# Altium PCB IGresupply.PcbDoc
Units mm, origin at the board's own origin, x right, y up, seen from the top; angles counter-clockwise.
Board outline 120.25 x 120.25 mm, 2 copper layers (Top Layer, Bottom Layer); 151 components, 101 nets, 570 pads, 87 vias.
Unrouted connection lines stored in the file: 13.
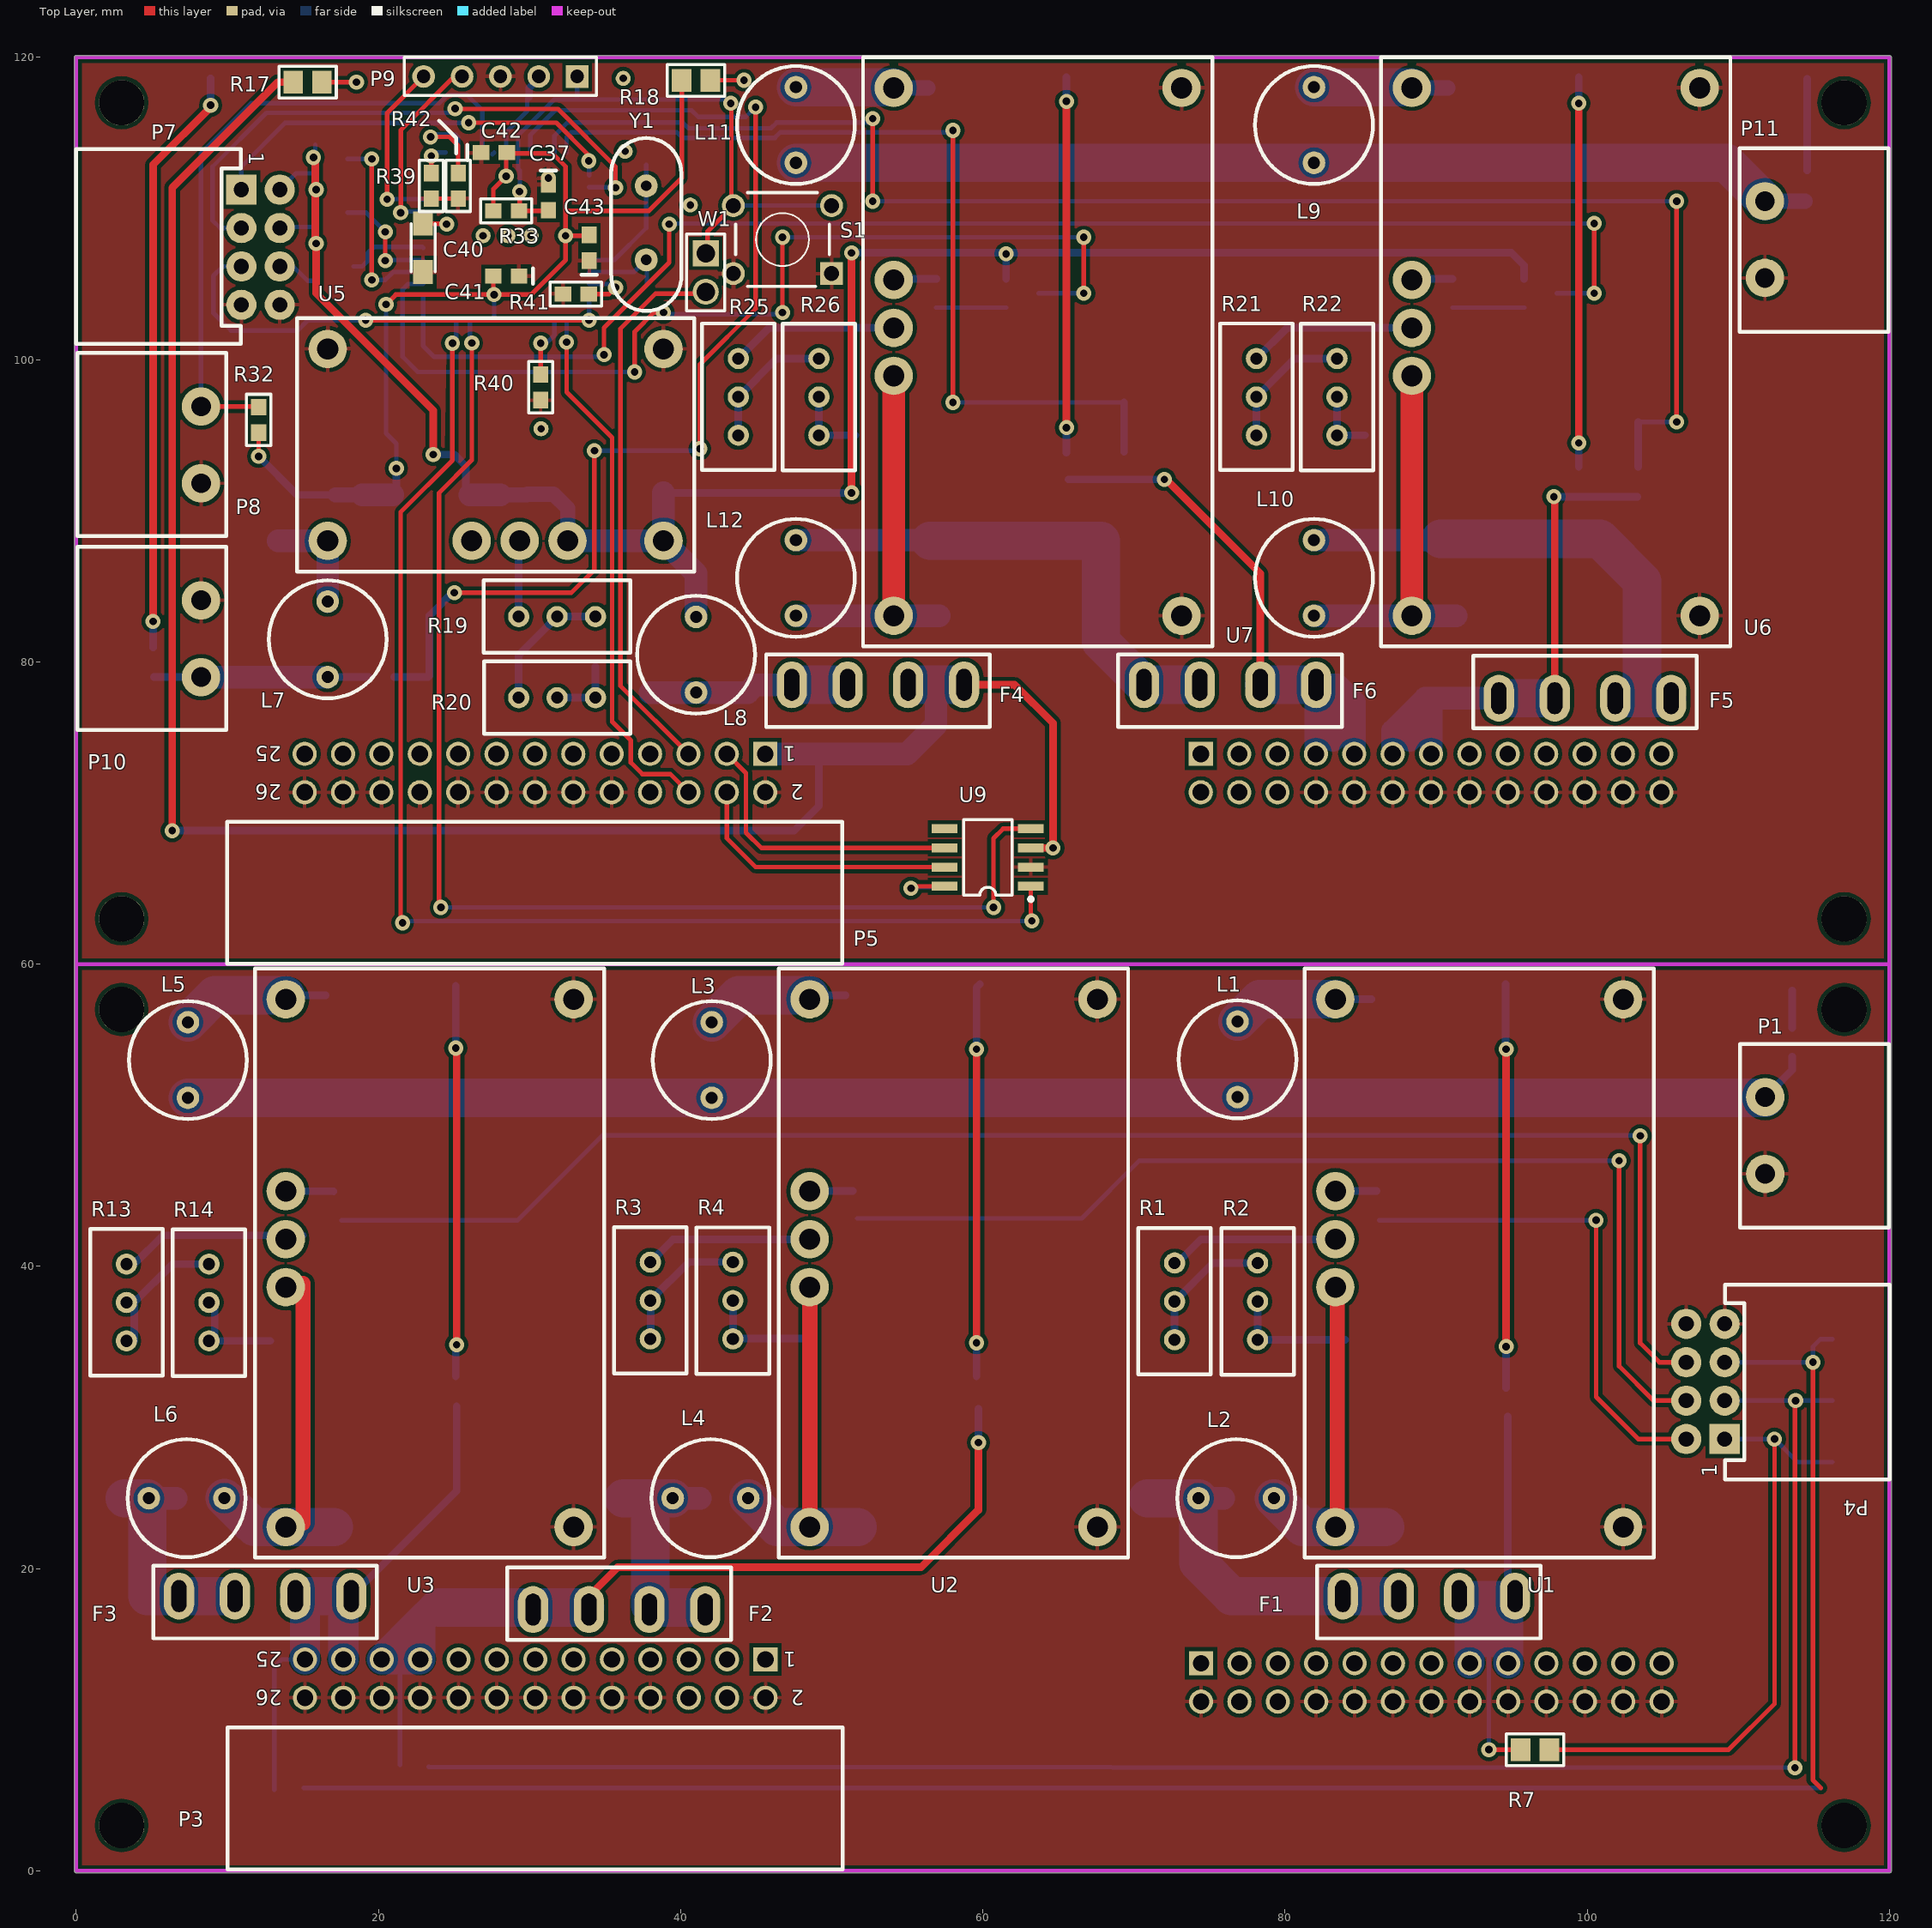
[diagram p0: Top Layer view]
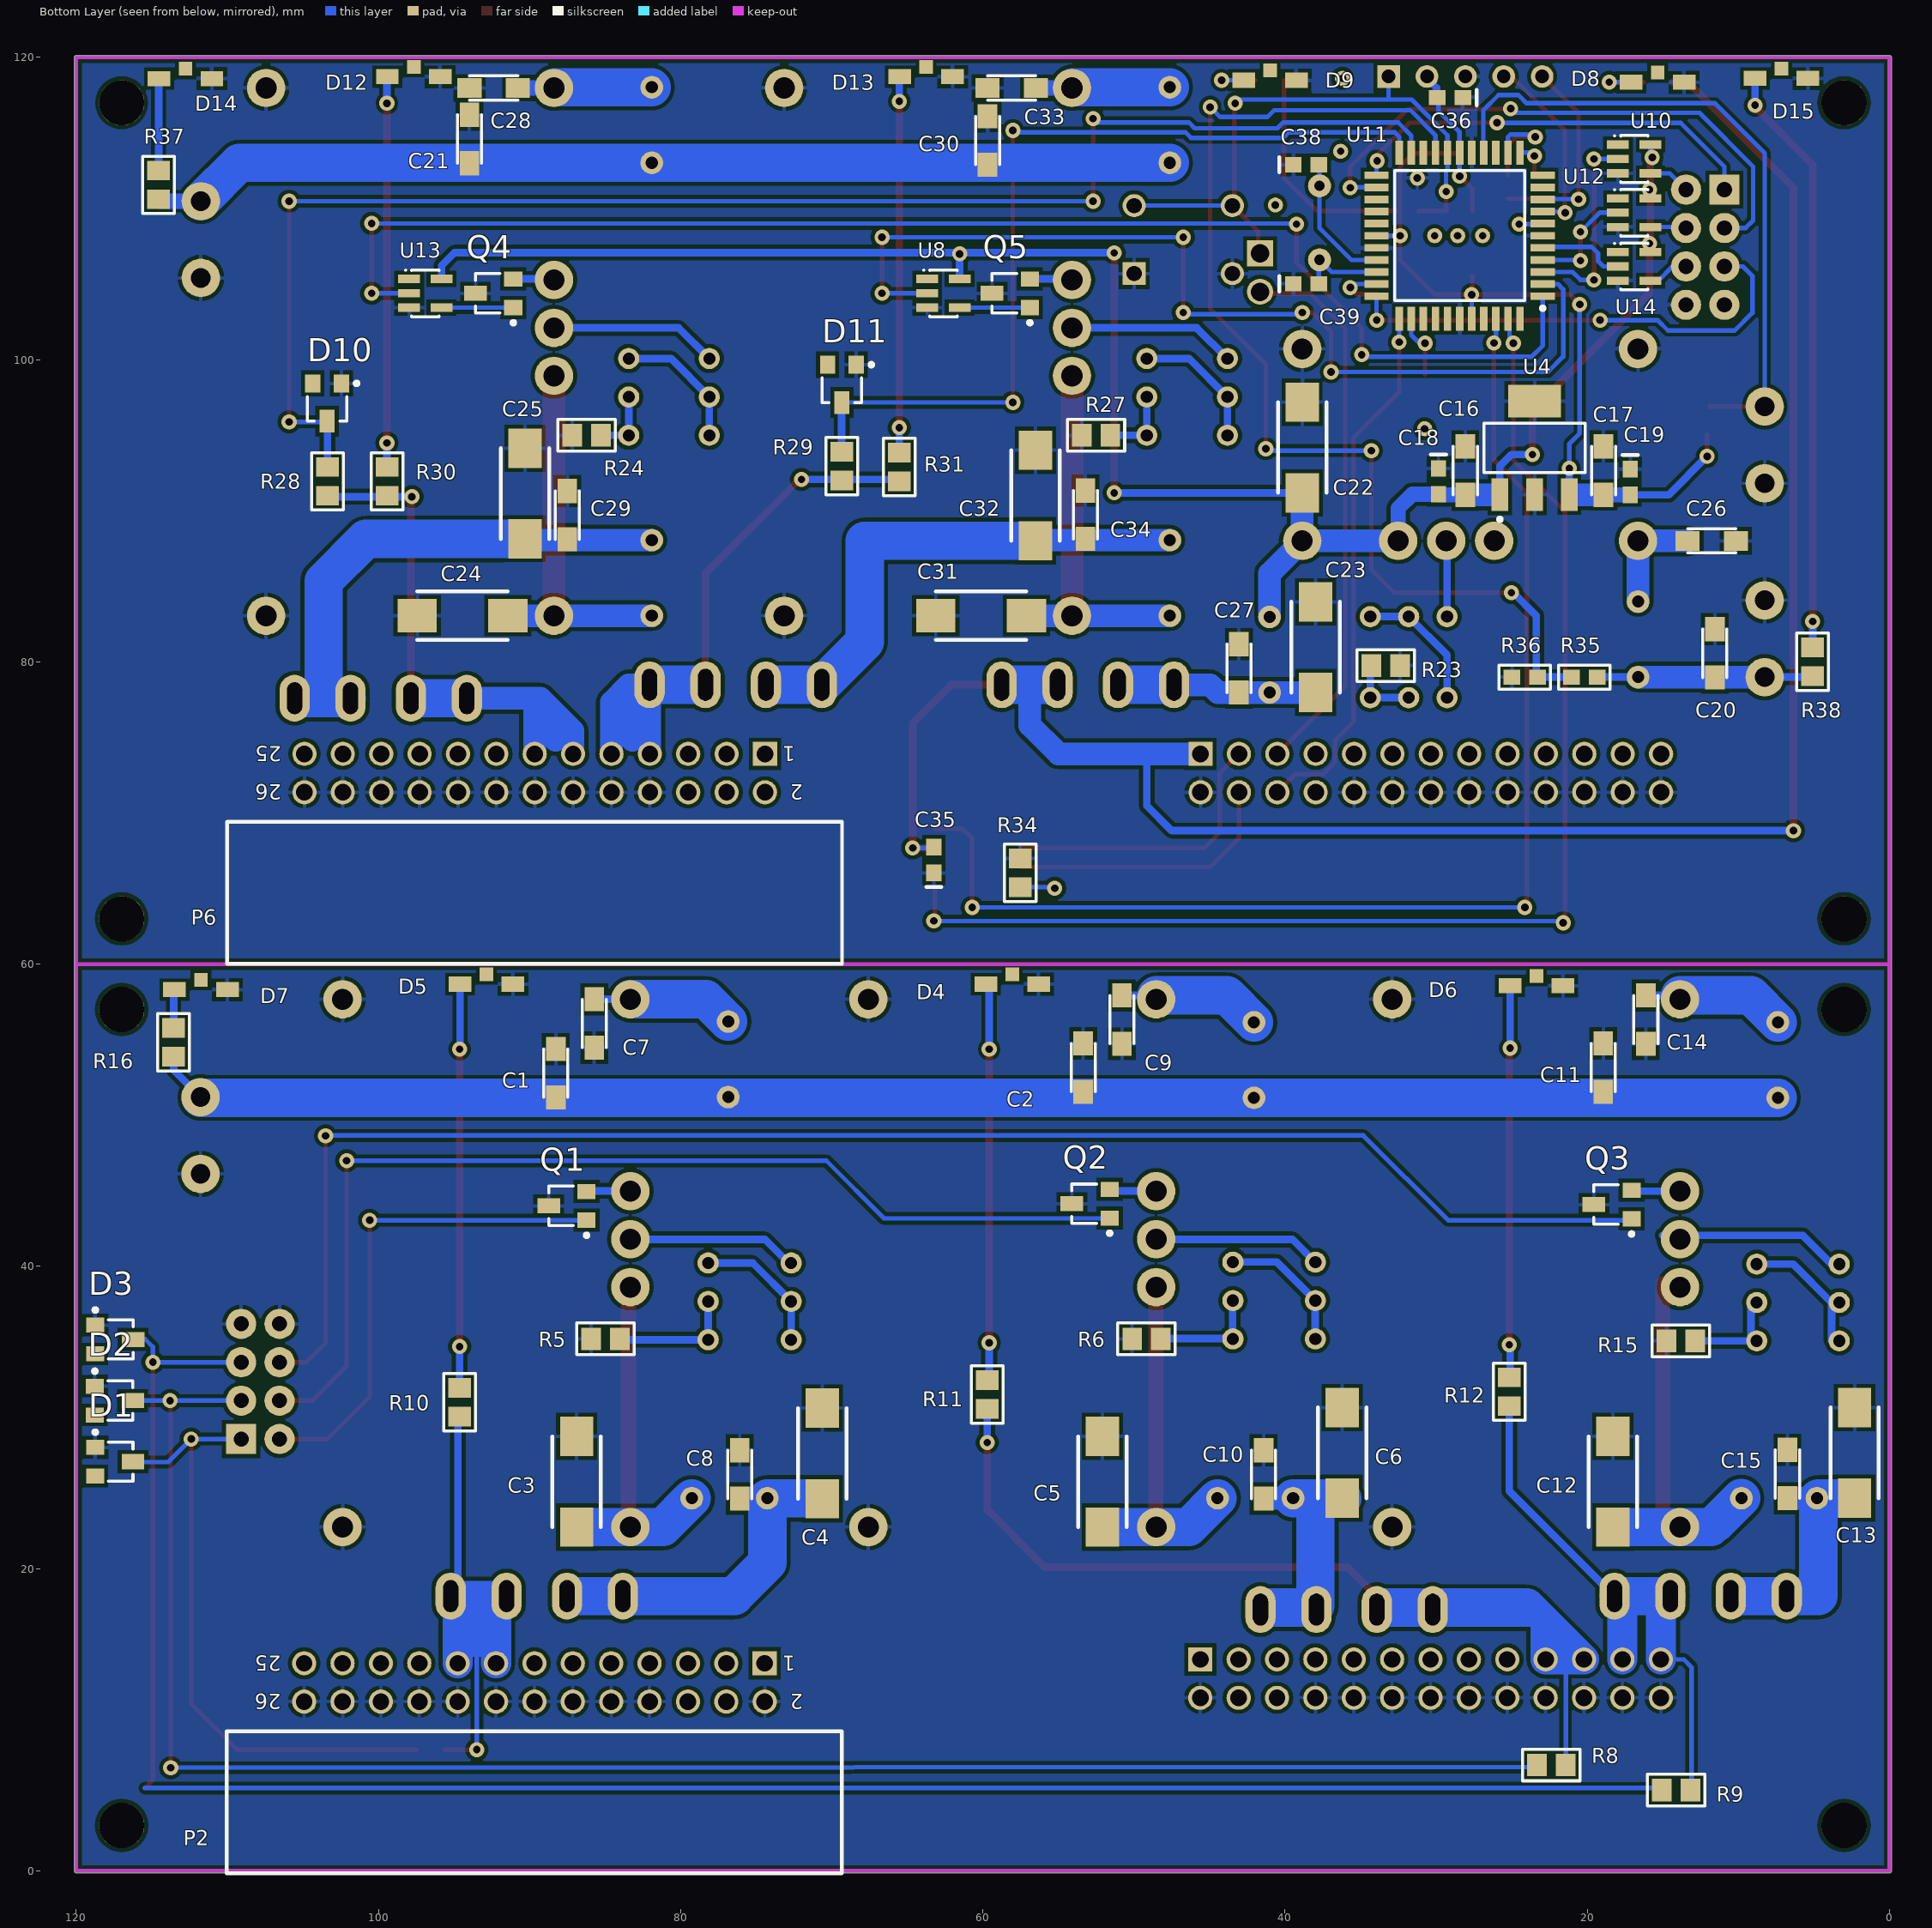
[diagram p1: Bottom Layer view, seen from below]

## Layer stack, top to bottom
Top Layer: signal copper 0.0356
Dielectric: dielectric 0.32, FR-4, Dk 4.8
Bottom Layer: signal copper 0.0356

## Board outline
0,-0.127 cw(c0,0) -0.127,0 -0.127,120 cw(c0,120) 0,120.127 120,120.127 cw(c120,120) 120.127,120 120.127,0 cw(c120,0) 120,-0.127

## Design rules (kind name [scope] priority, off if disabled: settings)
Clearance [All] p1: gap=0.254
PolygonConnect [All] p1: connectstyle=Relief reliefconductorwidth=0.254 reliefentries=4 polygonreliefangle="90 Angle"
RoutingVias [All] p1: holewidth=0.5 width=1 viastyle="Through Hole" minholewidth=0.5 minwidth=1 maxholewidth=0.711 maxwidth=1.27
SilkscreenOverComponentPads [All] p1: minsilkscreentomaskgap=0.254
SolderMaskExpansion [All] p1: expansion=0.102
Width [All] p1: maxlimit=2.54 minlimit=0.1 preferedwidth=0.3 minimp=50.000000 maximp=50.000000 favimp=50.000000
27 further rules are at their usual default settings.

## Classes and differential pairs
component class IGresupply2-2: C1 C2 C3 C4 C5 C6 C7 C8 C9 C10 C11 C12 C13 C14 C15 D1 D2 D3 D4 D5 D6 D7 F1 F2 F3 L1 L2 L3 L4 L5 L6 P1 P2 P3 P4 Q1 Q2 Q3 R1 R2 R3 R4 R5 R6 R7 R8 R9 R10 R11 R12 R13 R14 R15 R16 U1 U2 U3
component class IGresupply1-2: C16 C17 C18 C19 C20 C21 C22 C23 C24 C25 C26 C27 C28 C29 C30 C31 C32 C33 C34 C35 C36 C37 C38 C39 C40 C41 C42 C43 D8 D9 D10 D11 D12 D13 D14 D15 F4 F5 F6 L7 L8 L9 L10 L11 L12 P5 P6 P7 P8 P9 P10 P11 Q4 Q5 R17 R18 R19 R20 R21 R22 R23 R24 R25 R26 R27 R28 R29 R30 R31 R32 R33 R34 R35 R36 R37 R38 R39 R40 R41 R42 S1 S2 U4 U5 U6 U7 U8 U9 U10 U11 U12 U13 U14 W1 Y1

## Components (designator, comment, footprint, x,y, rotation, side; value= is the part's Value field where it differs from the comment)
C1 "Cap" "Boitier tantale A" 88.265,54.381 r270 bottom
C2 "Cap" "Boitier tantale A" 53.359,54.756 r270 bottom
C3 "Cap Pol" "Boitier tantale C" 86.887,22.752 r90 bottom
C4 "Cap Pol" "Boitier tantale C" 70.631,24.626 r90 bottom
C5 "Cap Pol" "Boitier tantale C" 52.089,22.752 r90 bottom
C6 "Cap Pol" "Boitier tantale C" 36.214,24.657 r90 bottom
C7 "Cap" "Boitier tantale A" 85.719,54.477 r90 bottom
C8 "Cap" "Boitier tantale A" 76.092,27.832 r270 bottom
C9 "Cap" "Boitier tantale A" 50.794,54.731 r90 bottom
C10 "Cap" "Boitier tantale A" 41.421,27.832 r270 bottom
C11 "Cap" "Boitier tantale A" 18.942,54.756 r270 bottom
C12 "Cap Pol" "Boitier tantale C" 18.307,22.752 r90 bottom
C13 "Cap Pol" "Boitier tantale C" 2.305,24.657 r90 bottom
C14 "Cap" "Boitier tantale A" 16.123,54.731 r90 bottom
C15 "Cap" "Boitier tantale A" 6.75,27.857 r270 bottom
C16 "Cap Pol" "Boitier tantale A" 28.067,91.059 r90 bottom
C17 "Cap Pol" "Boitier tantale A" 18.923,91.059 r90 bottom
C18 "Cap" C0603 29.845,91.948 r270 bottom
C19 "Cap" C0603 17.145,91.909 r270 bottom
C20 "Cap" "Boitier tantale A" 11.557,82.169 r270 bottom
C21 "Cap" "Boitier tantale A" 93.98,116.205 r270 bottom
C22 "Cap Pol" "Boitier tantale C" 38.862,91.186 r90 bottom
C23 "Cap Pol" "Boitier tantale C" 37.973,77.978 r90 bottom
C24 "Cap Pol" "Boitier tantale C" 91.44,83.058 r0 bottom
C25 "Cap Pol" "Boitier tantale C" 90.297,88.138 r90 bottom
C26 "Cap" "Boitier tantale A" 10.16,88.011 r0 bottom
C27 "Cap" "Boitier tantale A" 43.053,81.178 r270 bottom
C28 "Cap" "Boitier tantale A" 93.98,117.983 r180 bottom
C29 "Cap" "Boitier tantale A" 87.503,91.313 r270 bottom
C30 "Cap" "Boitier tantale A" 59.69,116.103 r270 bottom
C31 "Cap Pol" "Boitier tantale C" 57.119,83.058 r0 bottom
C32 "Cap Pol" "Boitier tantale C" 56.515,88.011 r90 bottom
C33 "Cap" "Boitier tantale A" 59.69,117.983 r180 bottom
C34 "Cap" "Boitier tantale A" 53.213,91.338 r270 bottom
C35 "Cap" C0603 63.246,66.89 r90 bottom
C36 "Cap" C0603 29.083,117.348 r0 bottom
C37 "Cap" C0603 31.242,110.744 r270 top
C38 "Cap" C0603 38.608,112.903 r180 bottom
C39 "Cap" C0603 38.608,105.029 r180 bottom
C40 "Cap Pol" "Boitier tantale A" 22.948,109.004 r270 top
C41 "Cap" C0603 28.448,105.537 r180 top
C42 "Cap" C0603 27.648,113.704 r0 top
C43 "Cap" C0603 33.948,107.404 r90 top
D1 "BZX84C3V3" SOT-23 117.5,27.076 r270 bottom
D2 "BZX84C3V3" SOT-23 117.526,31.115 r270 bottom
D3 "BZX84C3V3" SOT-23 117.495,35.164 r270 bottom
D4 "LED1" HSMS-C110 59.808,58.678 r180 bottom
D5 "LED1" HSMS-C110 94.606,58.678 r180 bottom
D6 "LED1" HSMS-C110 25.109,58.566 r180 bottom
D7 "LED1" HSMS-C110 113.501,58.312 r180 bottom
D8 "LED1" HSMS-C110 17.089,118.364 r180 bottom
D9 "LED1" HSMS-C110 42.743,118.491 r180 bottom
D10 "BZX84C3V3" SOT-23 103.403,97.18 r0 bottom
D11 "BZX84C3V3" SOT-23 69.332,98.42 r0 bottom
D12 "LED1" HSMS-C110 99.413,118.73 r180 bottom
D13 "LED1" HSMS-C110 65.504,118.73 r180 bottom
D14 "LED1" HSMS-C110 114.526,118.603 r180 bottom
D15 "LED1" HSMS-C110 8.89,118.618 r180 bottom
F1 "Fuse 1" MCCQ-122 83.822,18.18 r0 top
F2 "Fuse 1" MCCQ-122 41.628,17.291 r180 top
F3 "Fuse 1" MCCQ-122 6.797,18.18 r0 top
F4 "Fuse 1" MCCQ-122 47.354,78.486 r0 top
F5 "Fuse 1" MCCQ-122 105.554,77.597 r180 top
F6 "Fuse 1" MCCQ-122 70.659,78.486 r0 top
L1 "Inductor" 744772010 76.854,51.2 r90 top
L2 "Inductor" 744772010 79.267,24.657 r180 top
L3 "Inductor" 744772010 42.056,51.153 r90 top
L4 "Inductor" 744772010 44.469,24.657 r180 top
L5 "Inductor" 744772010 7.385,51.153 r90 top
L6 "Inductor" 744772010 9.798,24.657 r180 top
L7 "Inductor" 744772010 16.637,78.994 r90 top
L8 "Inductor" 744772010 41.021,82.978 r270 top
L9 "Inductor" 744772010 81.915,113.03 r90 top
L10 "Inductor" 744772010 81.915,83.058 r90 top
L11 "Inductor" 744772010 47.625,113.03 r90 top
L12 "Inductor" 744772010 47.625,83.058 r90 top
P1 "BAT2" "SL 5.08/90"#1 111.779,46.12 r90 top
P2 "Plane bus" HDR2X13H 74.441,13.735 r0 bottom
P3 "Plane bus 2" HDR2X13H 45.612,13.989 r180 top
P4 "Header 4X2H" HDR2X4H 109.093,28.575 r90 top
P5 "Plane bus" HDR2X13H 45.593,73.914 r180 top
P6 "Plane bus 2" HDR2X13H 74.422,73.914 r0 bottom
P7 "Header 4X2H" HDR2X4H 10.922,111.252 r270 top
P8 "AU" "SL 5.08/90"#2 8.255,96.901 r270 top
P9 "ICSP" HDR1X5 33.147,118.745 r180 top
P10 "BAT" "SL 5.08/90"#2 8.255,84.074 r270 top
P11 "BAT2" "SL 5.08/90"#2 111.76,105.41 r90 top
Q1 "SSM3K15FS" SOT-23 87.483,44.008 r90 bottom
Q2 "SSM3K15FS" SOT-23 52.857,44.145 r90 bottom
Q3 "SSM3K15FS" SOT-23 18.313,44.094 r90 bottom
Q4 "SSM3K15FS" SOT-23 92.329,104.394 r90 bottom
Q5 "SSM3K15FS" SOT-23 58.141,104.394 r90 bottom
R1 "RPot SM" 3296X 72.689,35.143 r90 top
R2 "RPot SM" 3296X 78.181,40.223 r270 top
R3 "RPot SM" 3296X 37.992,35.198 r90 top
R4 "RPot SM" 3296X 43.453,40.278 r270 top
R5 "Res2" 0805 84.982,35.198 r180 bottom
R6 "Res2" 0805 49.168,35.198 r180 bottom
R7 "Res2" 0805 96.539,8.02 r180 top
R8 "Res2" 0805 22.371,7.004 r180 bottom
R9 "Res2" 0805 14.116,5.353 r180 bottom
R10 "Res2" 0805 94.634,31.007 r270 bottom
R11 "Res2" 0805 59.709,31.515 r270 bottom
R12 "Res2" 0805 25.165,31.703 r270 bottom
R13 "RPot SM" 3296X 3.321,35.071 r90 top
R14 "RPot SM" 3296X 8.782,40.151 r270 top
R15 "Res2" 0805 13.801,35.071 r180 bottom
R16 "Res2" 0805 113.557,54.822 r270 bottom
R17 "Res2" 0805 15.306,118.364 r180 top
R18 "Res2" 0805 41.021,118.491 r180 top
R19 "RPot SM" 3296X 34.359,83 r180 top
R20 "RPot SM" 3296X 29.279,77.635 r0 top
R21 "RPot SM" 3296X 78.105,94.996 r90 top
R22 "RPot SM" 3296X 83.439,100.076 r270 top
R23 "Res2" 0805 33.34,79.756 r0 bottom
R24 "Res2" 0805 86.233,94.996 r180 bottom
R25 "RPot SM" 3296X 43.815,94.996 r90 top
R26 "RPot SM" 3296X 49.149,100.076 r270 top
R27 "Res2" 0805 52.512,94.996 r180 bottom
R28 "Res2" 0805 103.378,91.948 r270 bottom
R29 "Res2" 0805 69.342,92.964 r270 bottom
R30 "Res2" 0805 99.441,91.948 r270 bottom
R31 "Res2" 0805 65.532,92.903 r270 bottom
R32 "Res2" 0603 12.065,96.012 r270 top
R33 "Res2" 0603 28.448,109.855 r180 top
R34 "Res2" 0805 57.531,66.04 r270 bottom
R35 "Res2" 0603 20.193,78.994 r180 bottom
R36 "Res2" 0603 24.13,78.994 r180 bottom
R37 "Res2" 0805 114.554,111.567 r270 bottom
R38 "Res2" 0805 5.08,80.01 r270 bottom
R39 "Res2" 0603 23.495,111.506 r90 top
R40 "Res2" 0603 30.734,98.171 r90 top
R41 "Res2" 0603 33.071,104.343 r0 top
R42 "Res2" 0603 25.273,111.506 r90 top
S1 "rst" "Bouton poussoir" 46.736,107.95 r180 top
U1 "PTN78020W" EUK 83.331,57.677 r270 top
U2 "PTN78020W" EUK 48.533,57.677 r270 top
U3 "PTN78020W" EUK 13.862,57.677 r270 top
U4 "LM3940IS-3.3" SOT223 23.481,94.159 r180 bottom
U5 "PTN78060W" EUW 16.637,88.011 r0 top
U6 "PTN78020W" EUK 88.392,117.983 r270 top
U7 "PTN78020W" EUK 54.102,117.983 r270 top
U8 "74LVC1G17SE-7" DBV 62.611,104.394 r270 bottom
U9 "MCP2551" SOIC150-8 60.325,67.056 r90 top
U10 "74LVC1G17SE-7" DBV 16.891,113.284 r270 bottom
U11 "dsPIC33FJ128MC804_44pins" TQFP-44 28.448,108.204 r0 bottom
U12 "74LVC1G17SE-7" DBV 16.891,109.728 r270 bottom
U13 "74LVC1G17SE-7" DBV 96.901,104.394 r270 bottom
U14 "74LVC1G17SE-7" DBV 16.891,106.172 r270 bottom
W1 "Jumper" HDR1X2 41.656,107.036 r270 top
Y1 "XTAL" HC49US 37.719,108.966 r270 top

## Footprints (in the part's own frame and the unit in brackets; to place one, negate y for a bottom-side part, rotate by r counter-clockwise, add the part's x,y. Pads: shape width x height; smd on the part's side, far side on the other; paste and mask are expansions set on the pad)
0603 [mm]
  rect 1.1x1 smd: 1(-0.85,0) 2(0.85,0)
  silkscreen extent -1.7,-0.8 1.7,0.8
0805 [mm] "Chip Capacitor; Body 2.0 x 1.2 mm (LxW typ)"
  rect 1.3x1.5 smd: 1(-0.95,0) 2(0.95,0)
  silkscreen extent -1.9,-1.05 1.9,1.05
3296X [mm]
  round 1.4 hole 0.8: 1(0,0) 2(2.54,0) 3(5.08,0)
  silkscreen extent -2.3,-2.4 7.4,2.4
744772010 [mm]
  round 1.5 hole 0.8: 1(0,0) 2(5,0)
  silkscreen extent -1.4,-3.9 6.4,3.9
"Boitier tantale A" [mm]
  rect 1.6x1.3 smd: 1(0,0) 2(3.2,0)
  silkscreen extent 0,-0.8 3.2,0.8, body extent 0,-0.8 3.2,0.8, height 1.9
"Boitier tantale C" [mm]
  rect 2.6x2.2 smd: 1(0,0) 2(6,0)
  silkscreen extent 0,-1.6 6,1.6, body extent -0.13,-1.73 6.13,1.73, height 2.5
"Bouton poussoir" [mm]
  rect 1.524x1.524 hole 1: 1(-3.25,2.25)
  round 1.524 hole 1: 2(-3.25,-2.25) 3(3.25,2.25) 4(3.25,-2.25)
  silkscreen extent -3.1,-3.1 3.1,3.1, body extent -3.2,-3.2 3.2,3.2, height 4
C0603 [mm] "Chip Capacitor; Body 1.6 x 0.8 mm (LxW typ)"
  rect 1.1x1 smd: 1(-0.85,0) 2(0.85,0)
  silkscreen extent -1.78,-0.51 -1.78,0.51
DBV [mm]
  rect 0.55x1.45 smd: 1(-0.95,-1.075) 2(0,-1.075) 3(0.95,-1.075) 4(0.95,1.075) 5(-0.95,1.075)
  silkscreen extent -1.57,-1.35 1.55,0.9
EUK [mil]
  round 100 hole 55: 1(0,750) 2(0,0) 3(500,0) 4(625,0) 5(750,0) 6(1375,0) 7(1375,750)
  silkscreen extent -80,-80 1455,830
EUW [mil]
  round 100 hole 55: 1(0,500) 2(0,0) 3(375,0) 4(500,0) 5(625,0) 6(875,0) 7(875,500)
  silkscreen extent -80,-80 955,580
HC49US [mil]
  round 60 hole 27.56: 1(-100,0) 2(92.91,0)
  silkscreen extent -224,-92 226,92, body extent -224,-91 225,91, height 118
HDR1X2 [mil]
  rect 68x68 hole 48: 1(0,0)
  round 68 hole 48: 2(100,0)
  silkscreen extent -50,-50 150,50
HDR1X5 [mm] "Connector; Header; 5 Position"
  rect 1.5x1.5 hole 0.9: 1(0,0)
  round 1.5 hole 0.9: 2(2.54,0) 3(5.08,0) 4(7.62,0) 5(10.16,0)
  silkscreen extent -1.27,-1.27 11.43,1.27
HDR2X4H [mm] "Connector; Header; 4x2 Position; Right Angle"
  rect 2x2 hole 1: 1(0,0)
  round 2 hole 1: 2(0,2.54) 3(2.54,0) 4(2.54,2.54) 5(5.08,0) 6(5.08,2.54) 7(7.62,0) 8(7.62,2.54)
  silkscreen extent -2.68,-10.94 10.2,-0.04
HDR2X13H [mm] "Connector; Header; 13x2 Position; Right Angle"
  rect 1.6x1.6 hole 1.1: 1(0,0)
  round 1.6 hole 1.1: 2(0,2.54) 3(2.54,0) 4(2.54,2.54) 5(5.08,0) 6(5.08,2.54) 7(7.62,0) 8(7.62,2.54) 9(10.16,0) 10(10.16,2.54) 11(12.7,0) 12(12.7,2.54) 13(15.24,0) 14(15.24,2.54) 15(17.78,0) 16(17.78,2.54) 17(20.32,0) 18(20.32,2.54) 19(22.86,0) 20(22.86,2.54) 21(25.4,0) 22(25.4,2.54) 23(27.94,0) 24(27.94,2.54) 25(30.48,0) 26(30.48,2.54)
  silkscreen extent -5.1,4.5 35.6,13.9
HSMS-C110 [mm]
  rect 0.9x0.9 smd: 0(1.75,0.65)
  rect 1.5x1 smd: 1(0,0) 2(3.5,0)
MCCQ-122 [mm]
  oval 2x3.1 hole 1 slot 2.1 at 90 deg: 1(0,0) 1(3.7,0) 2(7.7,0) 2(11.4,0)
  silkscreen extent -1.7,-2.8 13.1,2
"SL 5.08/90"#1 [mm]
  round 2.54 hole 1.295: 1(0,0) 2(5.08,0)
  silkscreen extent -3.56,-8.18 8.58,1.68
"SL 5.08/90"#2 [mm]
  round 2.54 hole 1.3: 1(0,0) 2(5.08,0)
  silkscreen extent -3.56,-8.18 8.58,1.68
SOIC150-8 [mm] "Small Outline, Plastic, Narrow; 8 Leads; Body Width 3.8 mm; Pitch 1.27 mm"
  rect 0.6x1.7 smd: 1(-1.905,-2.85) 2(-0.635,-2.85) 3(0.635,-2.85) 4(1.905,-2.85) 5(1.905,2.85) 6(0.635,2.85) 7(-0.635,2.85) 8(-1.905,2.85)
  silkscreen extent -2.88,-2.97 2.5,1.6
SOT223 [mm] "SOT-223/SC-73; 4 Leads; Body 6.7 x 7.3 mm, inc. leads (LxW max)"
  rect 1.1x2.15 smd: 1(-2.3,-3.1) 2(0,-3.1) 3(2.3,-3.1)
  rect 3.5x2.15 smd: 4(0,3.1)
  silkscreen extent -3.35,-4.85 3.35,1.63
SOT-23 [mm] "SOT-23; 3 Leads; Body 3.0 x 2.6 mm, inc. leads (LxW max)"
  rect 1x1.2 smd: 1(-0.95,-1.25) 2(0.95,-1.25)
  rect 1x1.5 smd: 3(0,1.25)
  silkscreen extent -2.07,-1.38 1.3,1.25
TQFP-44 [mm] "QFP, Thin; 44 Leads; Body 10 x 10 mm; Pitch 0.8 mm; Lead Form 1.0/0.1 mm"
  rect 1.6x0.5 smd: 1(-5.5,4) 2(-5.5,3.2) 3(-5.5,2.4) 4(-5.5,1.6) 5(-5.5,0.8) 6(-5.5,0) 7(-5.5,-0.8) 8(-5.5,-1.6) 9(-5.5,-2.4) 10(-5.5,-3.2) 11(-5.5,-4) 23(5.5,-4) 24(5.5,-3.2) 25(5.5,-2.4) 26(5.5,-1.6) 27(5.5,-0.8) 28(5.5,0) 29(5.5,0.8) 30(5.5,1.6) 31(5.5,2.4) 32(5.5,3.2) 33(5.5,4)
  rect 0.5x1.6 smd: 12(-4,-5.5) 13(-3.2,-5.5) 14(-2.4,-5.5) 15(-1.6,-5.5) 16(-0.8,-5.5) 17(0,-5.5) 18(0.8,-5.5) 19(1.6,-5.5) 20(2.4,-5.5) 21(3.2,-5.5) 22(4,-5.5) 34(4,5.5) 35(3.2,5.5) 36(2.4,5.5) 37(1.6,5.5) 38(0.8,5.5) 39(0,5.5) 40(-0.8,5.5) 41(-1.6,5.5) 42(-2.4,5.5) 43(-3.2,5.5) 44(-4,5.5)
  silkscreen extent -5.62,-4.3 4.3,4.92

## Part data
C1 C2 C7 C8 C9 C10 C11 C14 C15 C18 C19 C20 C21 C26 C27 C28 C29 C30 C33 C34 C35 C36 C37 C38 C39 C41 C42 C43: "Capacitor"
C3 C4 C5 C6 C12 C13 C16 C17 C22 C23 C24 C25 C31 C32 C40: "Polarized Capacitor"
D1 D2 D3 D10 D11: library part "D Zener", "Zener Diode"
D4 D5 D6 D7 D8 D9 D12 D13 D14 D15: "Typical RED GaAs LED"
F1 F2 F3 F4 F5 F6: "Fuse"
P1 P8 P10 P11: library part 0436500203, "Micro-Fit, 3.0"
P2 P3 P5 P6: library part "Header 13X2H", "Header, 13-Pin, Dual row, Right Angle"
P4 P7: "Header, 4-Pin, Dual row, Right Angle"
P9: library part "Header 5", "Header, 5-Pin"
Q1 Q2 Q3 Q4 Q5: library part NMOS-2, "N-Channel Power MOSFET"
R1 R2 R3 R4 R13 R14 R19 R20 R21 R22 R25 R26: "Square Trimming Potentiometer"
R5 R6 R7 R8 R9 R10 R11 R12 R15 R16 R17 R18 R23 R24 R27 R28 R29 R30 R31 R32 R33 R34 R35 R36 R37 R38 R39 R40 R41 R42: "Resistor"
S1: library part SW-DPST, "Double-Pole, Single-Throw Switch"
U4: "1A Low-Dropout Regulator For 5V to 3.3V Conversion"
U8 U10 U12 U13 U14: "SINGLE BUS BUFFER GATE  WITH 3-STATE OUTPUT"
U9: "High Speed Can Transceiver"
W1: "Jumper Wire"
Y1: "Crystal Oscillator"

## Free pads (board coordinates)
  round 3 hole 3: 0(3,3) 0(3,57) 0(3,63) 0(3,117) 0(117,3) 0(117,57) 0(117,63) 0(117,117)
  round 1 hole 0.5: 0(26.924,108.204) 0(30.759,95.428) 1(28.575,108.204) 2(30.099,108.204) 3(31.242,112.014) 4(36.195,118.618) 5(40.64,110.236) 6(36.322,113.792)

## Via types
v1: diameter 1, hole 0.5, Top Layer to Bottom Layer, 87 vias

## Nets (pads, with @x,y where several pads share a name; then routed paths per layer and width w, separated by ;. In a path a pad name is that pad's centre, name@x,y a point inside that pad or via, vN(x,y) a via of type N, cw(c..) or ccw(c..) an arc to the next point about the centre after c; other vN are vias at no path point)
3V3: C17.1 C19.2 C36.2 C41.2 C42.2 C43.2 P9.2 R18.2 R32.2 R33.2 U4.3 U11.17 U11.28 U11.40 | length 80.5
  Top Layer w0.3: v1(12.065,93.599) R32.2@12.065,95.035 ; v1(20.498,103.657) 21.145,104.305 v1(27.648,104.305) 30.086,104.305 32.385,106.604 v1(32.385,108.204) ; v1@27.598,104.355 C41.2 ; R33.2 27.598,111.291 v1(28.448,112.141) 28.448,113.654 31.507,113.654 32.385,112.776 32.385,109.855 ; C43.2 33.898,108.204 v1(32.385,108.204) ; R18.2 40.071,112.028 37.898,109.855 32.385,109.855 ; v1(32.385,108.204) 32.385,109.855
  Bottom Layer w0.3: v1(20.498,103.657) 20.498,95.123 21.181,94.44 v1(21.181,92.809) ; U11.40 v1(27.648,104.305) ; v1(28.448,112.141) U11.17 28.448,115.062 29.845,116.459 29.845,117.26 C36.2 C36.2@29.972,117.387 ; v1(32.385,108.204) U11.28
  Bottom Layer w0.5: v1(12.065,93.599) 14.605,91.059 C19.2 ; U4.3 v1(21.181,92.809) ; C36.2@29.972,117.387 29.972,117.983 30.607,118.618 P9.2
  Bottom Layer w1: C19.2 C17.1
  Bottom Layer w1.5: C17.1 U4.3@20.955,91.059
+5V: C16.1 C18.2 C22.1 L8.1 U4.1 U5.5 U5.6 U8.5 U10.5 U12.5 U13.5 U14.5 | length 128.7
  Top Layer w0.5: v1(15.697,113.386) 15.816,113.267 v1@15.816,107.755 ; v1(15.875,107.696) 15.875,104.394 23.622,96.647 v1(23.622,93.726) ; v1(51.308,91.186) v1(51.308,107.061)
  Bottom Layer w0.3: v1(15.697,113.386) 15.816,113.504 U10.5 ; U12.5 v1@15.816,111.193 ; v1(51.308,107.061) v1@51.412,106.957 ; v1@61.454,106.957 61.536,106.875 v1@61.618,106.957
  Bottom Layer w0.5: v1(23.622,93.726) 25.019,93.726 25.781,92.964 U4.1 ; C22.1 v1@51.054,91.186 ; v1@51.308,107.084 v1@61.454,107.084 ; U8.5 v1@61.536,106.875 ; v1@61.618,107.084 94.973,107.084 95.826,106.231 U13.5
  Bottom Layer w1: C16.1 C18.2@29.806,91.059 ; C18.2 31.584,91.098 32.512,90.17 U5.5
  Bottom Layer w1.5: U4.1@26.035,91.059 C16.1 ; U5.5 U5.6 ; C22.1 U5.6 ; L8.1 41.021,85.852 U5.6
  other v1: 61.536,107.002 15.875,111.252
"ARRêT D'URGENCE": P8.1 R32.1 U11.15 | length 43.9
  Top Layer w0.3: P8.1 R32.1@11.899,96.901
  Bottom Layer w0.3: P8.1 8.255,113.665 11.557,116.967 24.003,116.967 24.551,117.515 25.868,117.515 26.873,116.51 26.873,113.729 U11.15
BOOTSTRAP: P5.6 U11.34 | length 35.8
  Top Layer w0.3: v1(32.448,101.156) 32.448,97.854 35.463,94.839 35.463,76.043 36.703,74.803 36.703,73.34 37.465,72.578 39.309,72.578 P5.6
  Bottom Layer w0.3: v1(32.448,101.156) U11.34
CAN_RX: U9.4 U11.42 | length 83.7
  Top Layer w0.3: v1@24.003,63.754 24.003,91.186 26.175,93.358 v1@26.175,100.851 ; v1(60.706,63.754) 60.706,68.326 61.341,68.961 U9.4
  Bottom Layer w0.3: v1(24.13,63.754) v1(60.706,63.754) ; v1@26.048,100.851 U11.42
  other v1: 26.175,101.105
CAN_TX: U9.1 U11.43 | length 85.5
  Top Layer w0.3: v1@21.463,62.85 21.463,89.916 24.892,93.345 v1@24.892,100.838 ; U9.1 63.175,62.936 v1(63.246,62.865)
  Bottom Layer w0.3: v1(21.59,62.738) 21.702,62.85 63.231,62.85 v1(63.246,62.865) ; v1@24.765,100.838 24.765,101.092 25.144,101.471 25.144,102.6 U11.43
  other v1: 24.892,101.092
CANH: P5.4 U9.7 | length 18.3
  Top Layer w0.3: P5.4 43.053,68.326 44.958,66.421 U9.7
CANL: P5.3 U9.6 | length 19.3
  Top Layer w0.3: P5.3 44.323,72.644 44.323,68.707 45.339,67.691 U9.6
"FUSE 2_PIC": D10.3 R28.1 U11.21 | length 101.5
  Top Layer w0.3: v1(52.705,110.49) v1@52.705,115.824 ; v1(105.918,95.885) v1(105.918,110.49)
  Bottom Layer w0.3: U11.21 31.648,114.833 32.512,115.697 40.132,115.697 40.513,115.316 45.974,115.316 46.355,115.697 v1@52.705,115.697 ; v1(52.705,110.49) v1(105.918,110.49) ; D10.3@103.378,95.885 v1(105.918,95.885)
  Bottom Layer w0.5: R28.1 D10.3@103.378,95.885
  other v1: 52.705,115.951
"FUSE 3_PIC": D11.3 R29.1 U11.22 | length 59.6
  Top Layer w0.3: v1(58.019,97.175) v1(58.019,115.169)
  Bottom Layer w0.3: U11.22 32.448,114.744 32.746,115.042 39.751,115.042 40.112,114.681 46.228,114.681 46.589,115.042 v1@58.019,115.042 ; v1(58.019,97.175) D11.3@69.342,97.175
  Bottom Layer w0.5: R29.1 D11.3@69.342,97.175
"FUSE 4": D1.3 P4.1 R7.1 | length 41.4
  Top Layer w0.3: R7.1 109.366,8.02 112.395,11.049 v1(112.395,28.575)
  Bottom Layer w0.3: P4.1 v1(112.395,28.575) 113.919,27.051 D1.3@116.225,27.051
"FUSE 4_PIC": P7.1 U11.23 | length 28
  Top Layer w0.3: v1(25.969,115.682) 31.765,115.682 33.909,113.538 v1(33.909,113.157)
  Bottom Layer w0.3: P7.1 10.922,112.776 13.807,115.661 25.948,115.661 v1(25.969,115.682) ; v1(33.909,113.157) 33.948,113.118 U11.23
"FUSE 5": D2.3 P4.3 R8.1 | length 121.8
  Top Layer w0.3: v1(113.75,6.816) v1@113.75,31.073
  Bottom Layer w0.3: R8.1@23.321,6.877 v1(113.75,6.816) ; P4.3 v1(113.792,31.115) D2.3@116.225,31.115
"FUSE 5_PIC": P7.3 U11.24 | length 38.7
  Top Layer w0.3: v1(25.07,116.611) 25.095,116.586 31.877,116.586 35.687,112.776 v1(35.687,111.379)
  Bottom Layer w0.3: P7.3 9.525,108.712 9.017,109.22 9.017,112.776 12.573,116.332 24.79,116.332 v1(25.07,116.611) ; U11.24 35.662,111.404 v1(35.687,111.379)
"FUSE 6": D3.3 P4.5 R9.1 | length 137.1
  Top Layer w0.3: v1(114.935,33.655) 114.935,6.007 115.462,5.48
  Bottom Layer w0.3: R9.1@15.066,5.48 115.462,5.48 ; P4.5 v1(114.935,33.655) 114.935,34.671 115.443,35.179 D3.3@116.225,35.179
"FUSE 6_PIC": P7.5 U11.33 | length 31.8
  Top Layer w0.3: v1(19.152,102.616) v1(33.934,102.616)
  Bottom Layer w0.3: P7.5 9.703,106.172 9.068,105.537 9.068,103.099 10.236,101.93 14.656,101.93 15.342,102.616 v1(19.152,102.616) ; v1(33.934,102.616) 33.948,102.63 U11.33
GND: C1.1 C2.1 C3.2 C4.2 C5.2 C6.2 C7.1 C8.1 C9.1 C10.1 C11.1 C12.2 C13.2 C14.1 C15.1 C16.2 C17.2 C18.1 C19.1 C20.1 C21.1 C22.2 C23.2 C24.2 C25.2 C26.1 C27.1 C28.1 C29.1 C30.1 C31.2 C32.2 C33.1 C34.1 C35.1 C36.1 C37.1 C38.1 C39.1 C40.2 C41.1 C42.1 C43.1 D1.1 D2.1 D3.1 D4.2 D5.2 D6.2 D7.2 D8.2 D9.2 D10.1 D11.1 D12.2 D13.2 D14.2 D15.2 P1.1 P2.2 P2.8 P2.10 P2.12 P2.14 P2.16 P2.18 P2.20 P2.22 P2.24 P2.26 P3.2 P3.8 P3.10 P3.12 P3.14 P3.16 P3.18 P3.20 P3.22 P3.24 P3.26 P4.7 P4.8 P5.2 P5.10 P5.12 P5.14 P5.16 P5.18 P5.20 P5.22 P5.24 P5.26 P6.8 P6.10 P6.12 P6.14 P6.16 P6.18 P6.20 P6.22 P6.24 P6.26 P7.7 P7.8 P8.2 P9.3 P10.1 P11.1 pad.3 Q1.3 Q2.3 Q3.3 Q4.3 Q5.3 R5.1 R6.1 R15.1 R23.1 R24.1 R27.1 R34.1 R36.1 R39.1 R40.1 R41.1 R42.1 S1.1 S1.3 U1.1 U1.7 U2.1 U2.7 U3.1 U3.7 U4.2 U4.4 U5.1 U5.7 U6.1 U6.7 U7.1 U7.7 U8.3 U9.2 U10.3 U11.6 U11.16 U11.29 U11.39 U12.3 U13.3 U14.3 | length 1.9
  Top Layer w0.3: R39.1 R42.1
  Bottom Layer w0.3: U11.16@27.544,113.6 U11.16
INHIBIT1_PIC: Q4.1 U13.4 | length 4.7
  Bottom Layer w0.3: Q4.1 U13.4
INHIBIT2_PIC: Q5.1 U8.4 | length 4.6
  Bottom Layer w0.3: Q5.1@56.916,103.444 U8.4
INHIBIT3: P4.2 Q1.1 | length 33.2
  Top Layer w0.3: v1(100.584,43.053) 100.584,31.369 103.378,28.575 P4.2
  Bottom Layer w0.3: Q1.1@86.233,43.053 v1(100.584,43.053)
INHIBIT3_PIC: P7.2 U10.4 | length 2.8
  Bottom Layer w0.3: P7.2 14.544,112.334 U10.4
INHIBIT4: P4.4 Q2.1 | length 71
  Top Layer w0.3: v1(102.108,46.99) 102.108,33.401 104.394,31.115 P4.4
  Bottom Layer w0.3: Q2.1@51.689,43.18 66.548,43.18 70.358,46.99 v1(102.108,46.99)
INHIBIT4_PIC: P7.4 U12.4 | length 2.3
  Bottom Layer w0.3: P7.4@13.528,108.778 U12.4
INHIBIT5: P4.6 Q3.1 | length 105.6
  Top Layer w0.3: v1(103.505,48.641) 103.505,34.925 104.775,33.655 P4.6
  Bottom Layer w0.3: Q3.1@17.565,43.053 29.21,43.053 34.817,48.66 v1@103.505,48.66
INHIBIT5_PIC: P7.6 U14.4 | length 2.7
  Bottom Layer w0.3: P7.6 14.351,106.172 15.301,105.222 U14.4
M\C\L\R\: C37.2 P9.1 R33.1 S1.2 S1.4 U11.18 W1.1 | length 40.8
  Top Layer w0.3: R33.1 C37.2@31.154,109.855 ; R33.1@29.337,109.894 v1(29.337,111.125) ; W1.1@41.783,106.807 41.783,108.497 S1.4 ; S1.4@43.359,110.2 v1@43.359,116.915
  Bottom Layer w0.3: v1(29.337,111.125) 29.352,111.14 29.352,112.515 29.248,112.619 U11.18 29.248,114.846 31.623,117.221 33.147,117.221 ; P9.1 33.147,117.221 ; v1@43.331,117.221 33.147,117.221 ; S1.4@43.359,110.2 S1.4 S1.2@49.859,110.2
  other v1: 43.307,116.967
NetC3_1: C3.1 L2.1 U1.5 U1.6 | length 24
  Top Layer w1: U1.6@83.458,23.006 U1.5@83.458,38.881
  Bottom Layer w2.54: L2.1 81.172,22.752 U1.6 C3.1@86.614,22.752
NetC4_1: C4.1 C8.2 F1.1 L2.2 | length 23.4
  Bottom Layer w1.5: L2.2 C8.2@75.946,24.657
  Bottom Layer w2.54: C4.1@70.916,24.657 L2.2 74.267,20.386 76.473,18.18 ; 73.298,24.626 L2.2@73.552,24.626 ; 76.454,18.18 76.473,18.18 ; F1.1@87.141,18.18 83.822,18.18 76.473,18.18
NetC5_1: C5.1 L4.1 U2.5 U2.6 | length 23.9
  Top Layer w1: U2.6@48.552,22.771 U2.5@48.552,38.646
  Bottom Layer w2.54: L4.1 46.374,22.752 U2.6 C5.1@51.708,22.752
NetC6_1: C6.1 C10.2 F2.1 L4.2 | length 15.4
  Bottom Layer w1.5: L4.2@39.596,24.657 C10.2@41.294,24.657
  Bottom Layer w2.54: C6.1 L4.2 ; 37.992,24.657 37.992,17.545 38.119,17.418 F2.1@41.294,17.418
NetC7_2: C7.2 L1.2 U1.2 | length 9.2
  Bottom Layer w0.5: U1.2 C7.2
  Bottom Layer w2.54: L1.2 78.335,57.682 ; 78.585,57.677 U1.2
NetC9_2: C9.2 L3.2 U2.2 | length 9.6
  Bottom Layer w0.5: U2.2@48.533,57.931 C9.2@50.921,57.931
  Bottom Layer w2.54: L3.2 43.834,57.931 U2.2@48.533,57.931
NetC12_1: C12.1 L6.1 U3.5 U3.6 | length 23.4
  Top Layer w1: U3.6@15.005,23.006 U3.5@15.005,38.881
  Bottom Layer w2.54: L6.1@9.817,24.676 11.468,23.025 ; 11.811,22.752 17.037,22.752
NetC13_1: C13.1 C15.2 F3.1 L6.2 | length 15.3
  Bottom Layer w1.5: L6.2 C15.2@6.604,24.657
  Bottom Layer w2.54: C13.1@3.194,24.657 4.699,24.657 4.699,18.18 6.797,18.18 F3.1@10.179,18.18
NetC14_2: C14.2 L5.2 U3.2 | length 9.9
  Bottom Layer w0.5: U3.2@13.862,57.931 C14.2@16.504,57.931
  Bottom Layer w2.54: L5.2 9.163,57.931 U3.2@13.862,57.931
NetC23_1: C23.1 C27.2 F4.1 L8.2 | length 12.5
  Bottom Layer w1.5: C23.1 L8.2 C27.2 44.45,77.978 44.958,78.486 F4.1@47.354,78.486
  Bottom Layer w2.54: F4.1@47.752,78.486 F4.1@50.673,78.486
NetC24_1: C24.1 L10.1 U6.5 U6.6 | length 25.3
  Top Layer w1.5: U6.6 U6.5
  Bottom Layer w1.5: L10.1 U6.6 C24.1@91.313,83.058
NetC25_1: C25.1 C29.2 F5.1 L10.2 | length 33.7
  Bottom Layer w1.5: L10.2 C25.1@90.217,88.058
  Bottom Layer w2.54: C25.1 100.838,88.138 103.632,85.344 103.632,77.597 ; F5.1@102.108,77.597 103.632,77.597 ; F5.1@105.283,77.597 103.632,77.597
NetC26_2: C26.2 L7.2 U5.2 | length 7.3
  Bottom Layer w1.5: C26.2 U5.2 L7.2
NetC28_2: C28.2 L9.2 U6.2 | length 8.8
  Bottom Layer w1: U6.2 C28.2
  Bottom Layer w2.54: L9.2 U6.2@88.345,118.03
NetC31_1: C31.1 L12.1 U7.5 U7.6 | length 25.4
  Top Layer w1.5: U7.6 U7.5
  Bottom Layer w1.5: L12.1 U7.6 C31.1
NetC32_1: C32.1 C34.2 F6.1 L12.2 | length 34
  Bottom Layer w1.5: L12.2 56.468,88.058 C32.1
  Bottom Layer w2.54: C32.1 67.818,88.011 67.818,81.327 F6.1@70.659,78.486 ; F6.1@70.993,78.486 F6.1@74.041,78.486
NetC33_2: C33.2 L11.2 U7.2 | length 8.7
  Bottom Layer w1: U7.2 C33.2@56.363,117.983
  Bottom Layer w2.54: L11.2 U7.2@54.055,118.03
NetC38_2: C38.2 U11.30 Y1.1 | length 8.8
  Bottom Layer w0.3: U11.30 35.611,106.604 37.719,108.712 C38.2@37.719,112.903
NetC39_2: C39.2 U11.31 Y1.2 | length 5.6
  Bottom Layer w0.3: U11.31 36.917,105.804 Y1.2 ; C39.2 Y1.2@37.758,106.567
NetC40_1: C40.1 U11.7 | length 3.2
  Top Layer w0.3: C40.1 24.473,109.004 v1(24.511,108.966)
  Bottom Layer w0.3: U11.7 22.986,108.966 v1(24.511,108.966)
NetD4_1: D4.1 R11.1 | length 26.1
  Top Layer w0.5: v1(59.582,34.944) v1(59.582,54.375)
  Bottom Layer w0.5: R11.1@59.582,32.719 v1(59.582,34.944) ; v1(59.582,54.375) 59.582,58.452 D4.1
NetD5_1: D5.1 R10.1 | length 26.7
  Top Layer w0.5: v1(94.634,34.69) v1(94.634,54.375)
  Bottom Layer w0.5: D5.1 94.606,54.403 v1(94.634,54.375) ; R10.1 v1(94.634,34.69)
NetD6_1: D6.1 R12.1 | length 25.7
  Top Layer w0.5: v1(25.165,34.817) v1@25.165,54.39
  Bottom Layer w0.5: R12.1@25.109,32.709 v1@25.109,34.761 ; v1(25.109,54.446) D6.1
NetD7_1: D7.1 R16.1 | length 2.5
  Bottom Layer w0.5: R16.1 D7.1@113.557,58.256
NetD8_1: D8.1 R17.1 | length 3.7
  Top Layer w0.3: R17.1 v1(18.542,118.364)
  Bottom Layer w0.3: D8.1 v1(18.542,118.364)
NetD9_1: D9.1 R18.1 | length 3.7
  Top Layer w0.3: R18.1 v1(44.196,118.491)
  Bottom Layer w0.3: D9.1 v1(44.196,118.491)
NetD12_1: D12.1 R30.1 | length 25.8
  Top Layer w0.5: v1(99.441,94.488) v1(99.441,116.967)
  Bottom Layer w0.5: R30.1 v1(99.441,94.488) ; v1(99.441,116.967) D12.1@99.441,118.702
NetD13_1: D13.1 R31.1 | length 24.8
  Top Layer w0.5: v1(65.532,95.504) v1(65.532,117.094)
  Bottom Layer w0.5: R31.1 v1(65.532,95.504) ; v1(65.532,117.094) D13.1@65.532,118.702
NetD14_1: D14.1 R37.1 | length 6.1
  Bottom Layer w0.5: R37.1 D14.1@114.554,118.575
NetD15_1: D15.1 R38.1 | length 39.3
  Top Layer w0.5: v1(5.08,82.677) 5.08,112.903 v1@9.017,116.84
  Bottom Layer w0.5: R38.1 v1(5.08,82.677) ; D15.1 8.89,116.967 v1@9.017,116.84
  other v1: 8.89,116.84
NetP5_5: P5.5 W1.2 | length 36.8
  Top Layer w0.3: P5.5 36.017,78.41 36.017,102.057 38.329,104.369 41.681,104.369 W1.2@41.783,104.267
NetQ1_2: Q1.2 U1.3 | length 2.5
  Bottom Layer w0.5: U1.3@83.605,44.997 Q1.2@86.064,44.997
NetQ2_2: Q2.2 U2.3 | length 2.3
  Bottom Layer w0.5: U2.3@49.061,44.997 Q2.2@51.393,44.997
NetQ3_2: Q3.2 U3.3 | length 3.2
  Bottom Layer w0.5: U3.3@13.862,44.988 Q3.2@17.018,44.958
NetQ4_2: Q4.2 U6.3 | length 2.6
  Bottom Layer w0.5: U6.3@88.453,105.344 Q4.2
NetQ5_2: Q5.2 U7.3 | length 2.8
  Bottom Layer w0.5: U7.3@54.163,105.344 Q5.2@56.916,105.344
NetR1_1: R1.1 R1.2 R2.1 | length 8.5
  Bottom Layer w0.5: R1.1 R1.2 75.229,40.223 R2.1@77.642,40.223
NetR1_3: R1.3 U1.4 | length 11.2
  Bottom Layer w0.5: R1.3@72.776,40.137 74.422,41.783 U1.4@83.331,41.783
NetR2_2: R2.2 R2.3 R5.2 | length 8.3
  Bottom Layer w0.5: R2.2 R2.3 R5.2@83.977,35.143
NetR3_1: R3.1 R3.2 R4.1 | length 8.9
  Bottom Layer w0.5: R3.1@38.011,35.217 38.011,37.757 40.551,40.297 R4.1@43.345,40.297
NetR3_3: R3.3 U2.4 | length 11.5
  Bottom Layer w0.5: R3.3@38.011,40.297 39.497,41.783 48.514,41.783 U2.4@48.806,42.075
NetR4_2: R4.2 R4.3 R6.2 | length 7.1
  Bottom Layer w0.5: R4.2@43.472,37.757 43.472,35.217 R6.2@48.006,35.217
NetR13_1: R13.1 R13.2 R14.1 | length 8.9
  Bottom Layer w0.5: R13.1@3.829,35.071 3.829,37.611 6.369,40.151 R14.1@9.163,40.151
NetR13_3: R13.3 U3.4 | length 12
  Bottom Layer w0.5: R13.3@3.829,40.151 5.734,42.056 U3.4@15.005,42.056
NetR14_2: R14.2 R14.3 R15.2 | length 6.2
  Bottom Layer w0.5: R14.2@9.163,37.611 9.163,35.071 R15.2
NetR19_1: R19.1 R19.2 R20.1 | length 9
  Bottom Layer w0.5: R20.1 29.279,80.46 R19.2 R19.1
NetR19_3: R19.3 U5.4 | length 5
  Bottom Layer w0.5: R19.3 29.279,87.953 U5.4
NetR20_2: R20.2 R20.3 R23.2 | length 4.6
  Bottom Layer w0.5: R20.2 R20.3 R23.2@34.359,79.698
NetR21_1: R21.1 R21.2 R22.1 | length 8.9
  Bottom Layer w0.5: R21.1 R21.2 80.645,100.076 R22.1
NetR21_3: R21.3 U6.4 | length 11.1
  Bottom Layer w0.5: R21.3 80.137,102.108 U6.4
NetR22_2: R22.2 R22.3 R24.2 | length 4.4
  Bottom Layer w0.5: R22.2 R22.3 R24.2
NetR25_1: R25.1 R25.2 R26.1 | length 8.9
  Bottom Layer w0.5: R25.1 R25.2 46.355,100.076 R26.1
NetR25_3: R25.3 U7.4 | length 11.1
  Bottom Layer w0.5: R25.3 45.847,102.108 U7.4
NetR26_2: R26.2 R26.3 R27.2 | length 5
  Bottom Layer w0.5: R26.2 R26.3 R27.2
NetR34_2: R34.2 U9.8 | length 4.6
  Top Layer w0.3: v1(55.245,65.024) 55.372,65.151 U9.8
  Bottom Layer w0.3: v1(55.245,65.024) 55.311,65.09 R34.2
NetR35_1: R35.1 R36.2 U11.19 | length 74.6
  Top Layer w0.3: v1(25.019,84.582) 32.766,84.582 34.29,86.106 v1(34.29,93.98) ; v1(41.275,94.107) 41.275,99.695 44.958,103.378 v1(44.958,116.713)
  Bottom Layer w0.3: U11.19 30.048,114.863 31.69,116.505 40.721,116.505 41.163,116.063 44.308,116.063 v1@44.831,116.586 ; v1(34.29,93.98) 41.148,93.98 v1(41.275,94.107)
  Bottom Layer w0.5: R35.1 R36.2 23.368,79.082 23.368,83.058 24.892,84.582 v1(25.019,84.582)
NetR39_2: R39.2 U11.12 | length 2
  Top Layer w0.3: R39.2 23.495,113.118 v1@23.495,113.411
  Bottom Layer w0.3: v1@23.495,113.741 23.532,113.704 U11.12
  other v1: 23.495,113.487
NetR40_2: R40.2 U11.35 | length 4.3
  Top Layer w0.3: R40.2 v1(30.734,101.092)
  Bottom Layer w0.3: v1(30.734,101.092) 31.106,101.092 31.648,101.634 U11.35
NetR41_2: R41.2 U11.32 | length 3.8
  Top Layer w0.3: R41.2 35.255,104.343 v1(35.687,104.775)
  Bottom Layer w0.3: U11.32 35.458,105.004 v1(35.687,104.775)
NetR42_2: R42.2 U11.13 | length 7
  Top Layer w0.3: v1(23.444,114.741) 24.705,114.741 25.273,114.173 R42.2@25.273,112.229
  Bottom Layer w0.3: v1(23.444,114.741) 23.611,114.908 25.071,114.908 25.248,114.731 U11.13
NetU8_2: U8.2 U11.2 | length 66.5
  Top Layer w0.3: v1(36.957,99.187) 36.957,101.854 38.227,103.124 v1(38.862,103.124) ; v1@46.736,103.251 v1(46.736,108.102) ; v1(66.675,104.394) v1(66.675,108.102) v1@66.675,108.331
  Bottom Layer w0.3: U11.2 21.946,105.004 21.59,104.648 21.59,100.203 22.606,99.187 v1(36.957,99.187) ; v1(38.862,103.124) 38.987,102.999 46.611,102.999 v1(46.736,103.124) ; v1(46.736,108.102) v1(66.675,108.102) ; U8.2 v1(66.675,104.394)
NetU10_2: U10.2 U11.3 | length 13.4
  Top Layer w0.3: v1@19.543,105.298 19.543,113.269 v1(19.558,113.284)
  Bottom Layer w0.3: U10.2 v1(19.558,113.284) v1@19.812,113.284 ; v1(19.558,105.283) 20.447,105.283 20.813,105.649 20.821,105.649 20.976,105.804 U11.3
NetU11_1: U11.1 U13.2 | length 94.4
  Top Layer w0.3: v1(34.925,100.33) 34.925,102.108 39.239,106.422 ; 39.243,106.426 v1(39.243,108.966) ; v1(100.457,104.394) v1(100.457,109.017) v1@100.457,109.118
  Bottom Layer w0.3: U11.1 22.948,100.928 23.688,100.188 34.783,100.188 v1(34.925,100.33) ; v1@39.294,109.017 v1(100.457,109.017) ; U13.2 v1(100.457,104.394)
NetU11_4: U11.4 U12.2 | length 7.2
  Top Layer w0.3: v1(20.447,106.553) v1(20.447,108.458)
  Bottom Layer w0.3: U12.2 19.177,109.728 v1(20.447,108.458) ; v1@20.65,106.604 U11.4
NetU11_5: U11.5 U14.2 | length 5.5
  Bottom Layer w0.3: U14.2@18.347,106.172 18.923,106.172 19.289,106.538 19.289,107.046 19.7,107.457 22.895,107.457 U11.5
PGC: P9.5 U11.9 | length 11.5
  Top Layer w0.3: v1(20.574,110.617) 20.574,116.332 P9.5
  Bottom Layer w0.3: v1(20.574,110.617) 20.589,110.632 22.92,110.632 U11.9
PGD: P9.4 U11.8 | length 12.5
  Top Layer w0.3: v1(21.463,109.728) 21.478,109.743 21.478,115.204 25.019,118.745 P9.4
  Bottom Layer w0.3: v1(21.463,109.728) 21.539,109.804 U11.8
VBAT: C20.2 L7.1 P10.2 R35.2 R38.2 | length 14.2
  Bottom Layer w0.5: R38.2@5.141,78.994 P10.2 ; L7.1 R35.2
  Bottom Layer w1.5: P10.2 L7.1
VBAT2: C1.2 C2.2 C11.2 C21.2 C30.2 L1.1 L3.1 L5.1 L9.1 L11.1 P1.2 P11.2 R16.2 R37.2 | length 175.7
  Bottom Layer w0.5: P1.2 113.557,52.978 R16.2
  Bottom Layer w1: P11.2 R37.2@114.427,110.49
  Bottom Layer w2.54: L5.1 L3.1 53.359,51.153 P1.2@111.779,51.153 ; L11.1 59.69,113.03 L9.1 109.22,113.03 P11.2
VCC: C35.2 F4.2 P5.1 R17.2 U9.3 | length 135.6
  Top Layer w0.3: 61.468,78.486 61.536,78.554
  Top Layer w0.5: v1@6.35,69.215 6.35,78.382 6.35,111.379 13.335,118.364 R17.2 ; F4.2@58.754,78.486 61.468,78.486 62.103,78.486 64.643,75.946 v1(64.643,67.691) U9.3
  Bottom Layer w0.3: C35.2@63.295,67.691 v1(64.643,67.691)
  Bottom Layer w0.5: v1(6.35,68.834) 47.498,68.834 49.149,70.485 49.149,73.914
  Bottom Layer w1.5: P5.1 49.149,73.914 54.991,73.914 56.896,75.819 56.896,78.486
  Bottom Layer w2.54: F4.2@55.499,78.486 56.896,78.486 F4.2@58.293,78.486
VDD1: F6.2 P6.7 P6.9 R29.2 R31.2 | length 39.8
  Top Layer w0.5: v1@72.073,92.138 78.359,85.852 F6.2@78.359,78.486
  Bottom Layer w0.5: R31.2@65.654,92.075 v1(72.009,92.075)
  Bottom Layer w1.5: P6.7 F6.2@82.042,78.469 ; F6.2@82.059,78.486 83.439,78.486 84.582,77.343 P6.9 ; 83.185,74.803 83.185,77.978
  Bottom Layer w2.54: F6.2@78.613,78.486 F6.2@81.661,78.486
VDD2: F5.2 P6.11 P6.13 R28.2 R30.2 | length 36.9
  Top Layer w0.5: v1(97.79,90.932) 97.854,90.868 F5.2@97.854,77.597
  Bottom Layer w0.5: v1(97.79,90.932) R28.2@103.312,90.932
  Bottom Layer w1.5: P6.11 87.122,75.438 89.281,77.597 ; 88.265,74.803 88.265,76.454 ; P6.13 89.662,77.216 89.281,77.597 ; F5.2@94.154,77.597 89.281,77.597
  Bottom Layer w2.54: F5.2@94.488,77.597 F5.2@97.536,77.597
VDD3: F1.2 P2.15 P2.17 R7.2 R10.2 | length 34.9
  Top Layer w0.3: v1(93.491,8.02) R7.2
  Bottom Layer w0.3: v1(93.491,8.02) 93.491,15.132
  Bottom Layer w0.5: R10.2@94.742,30.057 94.742,18.533 F1.2@95.095,18.18
  Bottom Layer w2: P2.15 F1.2@92.221,18.18 ; 92.602,18.18 93.491,18.18 ; 93.491,15.132 93.491,18.18 ; P2.17 F1.2@94.761,17.719 ; F1.2@94.761,18.18 93.491,18.18
VDD4: F2.2 P3.19 P3.21 R8.2 R11.2 | length 63.7
  Top Layer w0.5: F2.2@33.928,17.418 33.928,18.18 35.833,20.085 55.899,20.085 59.69,23.876 ; 59.709,23.876 v1(59.709,28.34)
  Bottom Layer w0.3: R8.2 21.421,13.989 21.421,15.193
  Bottom Layer w0.5: v1(59.709,28.34) R11.2
  Bottom Layer w2: 24.022,17.418 23.641,17.418 22.752,16.529 ; 22.752,16.529 P3.19 21.421,13.989 P3.21 22.752,16.529
  Bottom Layer w2.54: 24.022,17.418 30.228,17.418 F2.2@33.674,17.418
VDD5: F3.2 P3.23 P3.25 R9.2 R12.2 | length 37
  Bottom Layer w0.3: R9.2@13.1,5.353 13.1,13.481 13.608,13.989 P3.25
  Bottom Layer w0.5: F3.2@18.197,18.18 25.154,25.137 ; 25.165,25.146 R12.2
  Bottom Layer w2: P3.25 F3.2@15.132,17.545 ; P3.23 17.672,17.655 F3.2@18.197,18.18
  Bottom Layer w2.54: F3.2@14.751,18.18 F3.2@17.926,18.18
pads on no net: D1.2 D2.2 D3.2 D4.0 D5.0 D6.0 D7.0 D8.0 D9.0 D10.2 D11.2 D12.0 D13.0 D14.0 D15.0 P2.1 P2.3 P2.4 P2.5 P2.6 P2.7 P2.9 P2.11 P2.13 P2.19 P2.21 P2.23 P2.25 P3.1 P3.3 P3.4 P3.5 P3.6 P3.7 P3.9 P3.11 P3.13 P3.15 P3.17 P5.7 P5.8 P5.9 P5.11 P5.13 P5.15 P5.17 P5.19 P5.21 P5.23 P5.25 P6.1 P6.2 P6.3 P6.4 P6.5 P6.6 P6.15 P6.17 P6.19 P6.21 P6.23 P6.25 U5.3 U8.1 U9.5 U10.1 U11.10 U11.11 U11.14 U11.20 U11.25 U11.26 U11.27 U11.36 U11.37 U11.38 U11.41 U11.44 U12.1 U13.1 U14.1

## Polygon pours and split planes (outlines as drawn)
GND on Bottom Layer "Bottom Layer-GND" (solid, pour order 2): 0,120 120,120 120,0 0,0
GND on Top Layer "Top Layer-GND" (solid, pour order 4): 0,120 120,120 120,0 0,0

## Keep-outs
Keep-Out Layer:
  lines w0.254: 0,60 0,120 120,120 120,60 ; 0,60 120,60 ; 0,60 0,0 120,0 120,60

## Silkscreen, mask and mechanical layers (free items; w line width, h text height)
Top Overlay:
  lines w0.254: 24.003,115.824 25.146,114.681 25.146,113.665
Mechanical 15:
  lines w0.2: -5,120 -2,120 0,122 0,125 ; -3,122 -1,122 ; -2,121 -2,123 ; 0,60 120,60 ; 120,-5 120,-2 122,0 125,0 ; 120,125 120,122 122,120 125,120 ; 121,-2 123,-2 ; 121,122 123,122 ; 122,-3 122,-1 ; 122,121 122,123 ; 0,0 120,0 120,120 0,120 0,0
Drill Drawing:
  text ".Legend" at -14.275,-58.344 h1.52

## Dimensions
0,120 to 120,120 on Mechanical 1
120,120 to 120,0 on Mechanical 1

## Text inside footprints (layer, text, board x,y; h text height)
P2: Bottom Overlay "26" at 106.445,11.703 h1 r180; Bottom Overlay "25" at 106.445,14.243 h1 r180; Bottom Overlay "1" at 72.409,14.243 h1 r180; Bottom Overlay "2" at 71.901,11.703 h1 r180
P3: Top Overlay "26" at 13.608,11.957 h1 r180; Top Overlay "25" at 13.608,14.497 h1 r180; Top Overlay "1" at 47.644,14.497 h1 r180; Top Overlay "2" at 48.152,11.957 h1 r180
P4: Top Overlay "1" at 108.593,26.075 h1 r90
P5: Top Overlay "2" at 48.133,71.882 h1 r180; Top Overlay "1" at 47.625,74.422 h1 r180; Top Overlay "25" at 13.589,74.422 h1 r180; Top Overlay "26" at 13.589,71.882 h1 r180
P6: Bottom Overlay "2" at 71.882,71.882 h1 r180; Bottom Overlay "1" at 72.39,74.422 h1 r180; Bottom Overlay "25" at 106.426,74.422 h1 r180; Bottom Overlay "26" at 106.426,71.882 h1 r180
P7: Top Overlay "1" at 11.422,113.752 h1 r270